# EAGLE board SO8 (EAGLE 6.4)
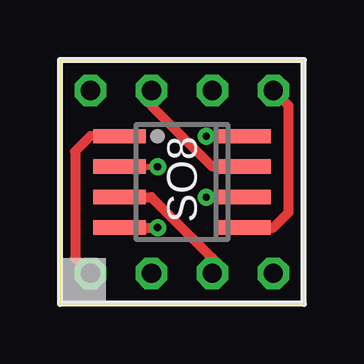
[diagram p0: board, top side]
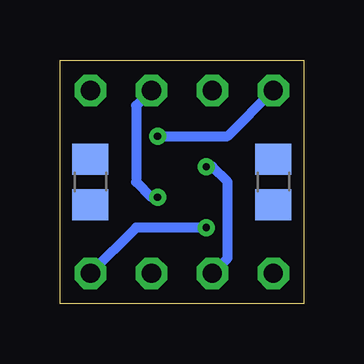
[diagram p1: board, bottom side, seen from below]

Size 10.16 x 10.16 mm. Coordinates in mm from the lower left corner, seen from the top.
Outline: 0,0 10.16,0 10.16,10.16 0,10.16 0,0
Copper layers (1*16): Top 0.035mm / dielectric 1.5mm / Bottom 0.035mm
Design rules "default": minimum track width 10mil, minimum drill 0.6mm, track to track 8mil, track to pad 8mil, pad to pad 8mil, via to via 8mil, smd to smd 8mil, copper to edge 40mil, drill to drill 8mil, minimum pad ring 10mil, minimum via ring 8mil, stop-mask expansion 4mil, vias tented up to drill 0mil, thermal gap 10mil

## Footprints (pad centres in the part's own frame; a part is rotated, then mirrored left to right if it is on the bottom)
C0805 = smd 1.3 x 1.5: 1 -0.95,0; 2 0.95,0
SO8 = smd 0.6 x 2.2: 1 -1.905,-2.6; 2 -0.635,-2.6; 3 0.635,-2.6; 4 1.905,-2.6; 5 1.905,2.6; 6 0.635,2.6; 7 -0.635,2.6; 8 -1.905,2.6
1 = drill 0.8 octagon: P$1 0,0

## Placement (x,y rotation side)
E$1  [C0805]  1.27,5.08 90 bottom
E$2  [C0805]  8.89,5.08 90 bottom
E$10  [SO8]  5.08,5.08 90 top
E$11  [1]  1.27,8.89 0 top
E$12  [1]  3.81,8.89 0 top
E$13  [1]  6.35,8.89 0 top
E$14  [1]  8.89,8.89 0 top
E$15  [1]  1.27,1.27 0 top
E$16  [1]  3.81,1.27 0 top
E$17  [1]  6.35,1.27 0 top
E$18  [1]  8.89,1.27 0 top

## Library data of the parts
E$1 E$2 E$10 = ref-packages
E$11-E$18 = drill

## Nets
S$7: E$10.4 E$11.P$1
S$8: E$10.3 E$12.P$1
S$9: E$10.2 E$13.P$1
S$10: E$10.1 E$14.P$1
S$11: E$10.8 E$18.P$1
S$12: E$10.7 E$17.P$1
S$13: E$10.6 E$16.P$1
S$14: E$10.5 E$15.P$1

## Tracks (layer width: path | path; a pad name or v marks a point on that pad's centre or on a via)
S$7  (via drill 0.3)
  Top 0.406: E$10.4 v6.1,6.99
  Bottom 0.406: v6.1,6.99 3.17,6.99 E$11.P$1
S$8
  Top 0.254: 6.35,5.71 E$10.3
  Top 0.406: E$12.P$1 3.81,8.26 6.35,5.71
S$9  (via drill 0.3)
  Top 0.254: E$10.2 v6.1,4.45
  Bottom 0.406: E$13.P$1 6.99,8.26 6.99,5.08 6.35,4.45 v6.1,4.45
S$10
  Top 0.406: E$10.1 8.89,3.17 9.53,3.81 9.53,8.26 E$14.P$1
S$11  (via drill 0.3)
  Top 0.406: E$10.8 v4.06,3.17
  Bottom 0.406: v4.06,3.17 6.99,3.17 E$18.P$1
S$12
  Top 0.406: E$10.7 3.81,4.45 6.35,1.91 E$17.P$1
S$13  (via drill 0.3)
  Top 0.254: E$10.6 v4.06,5.71
  Bottom 0.254: 3.81,5.71 v4.06,5.71
  Bottom 0.406: E$16.P$1 3.17,1.91 3.17,5.08 3.81,5.71
S$14
  Top 0.254: E$10.5 1.27,6.99
  Top 0.406: 1.27,6.99 0.64,6.35 0.64,1.91 E$15.P$1

## Text on the board
tNames: SO8